# EAGLE board motorboard (EAGLE 8.0.1)
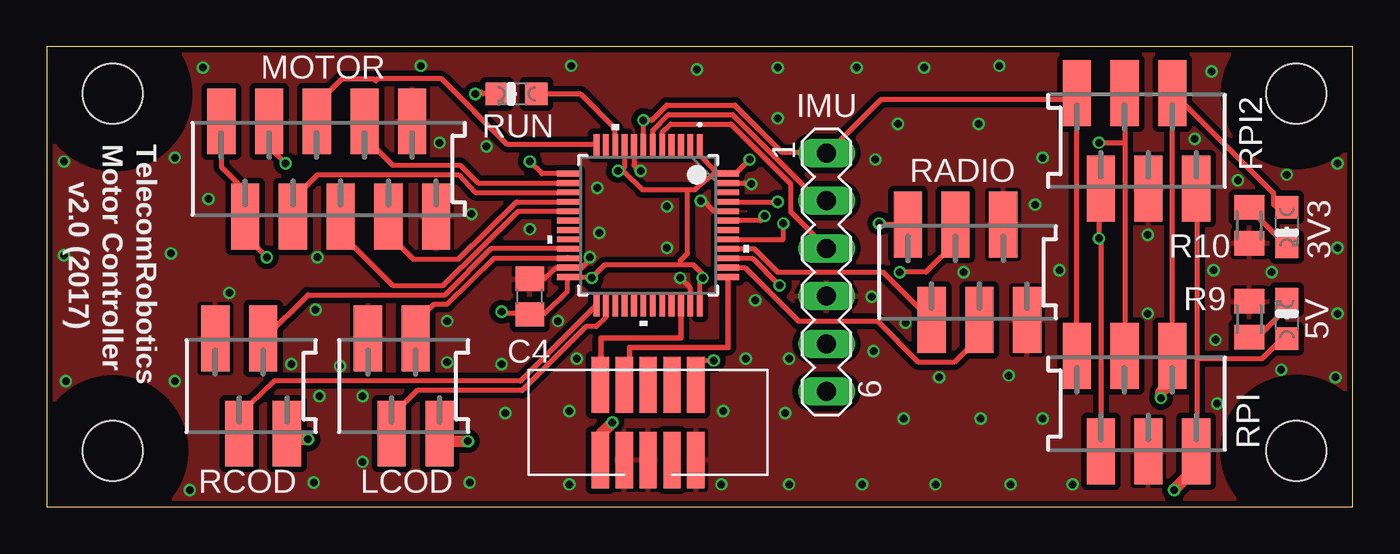
[diagram p0: board, top side]
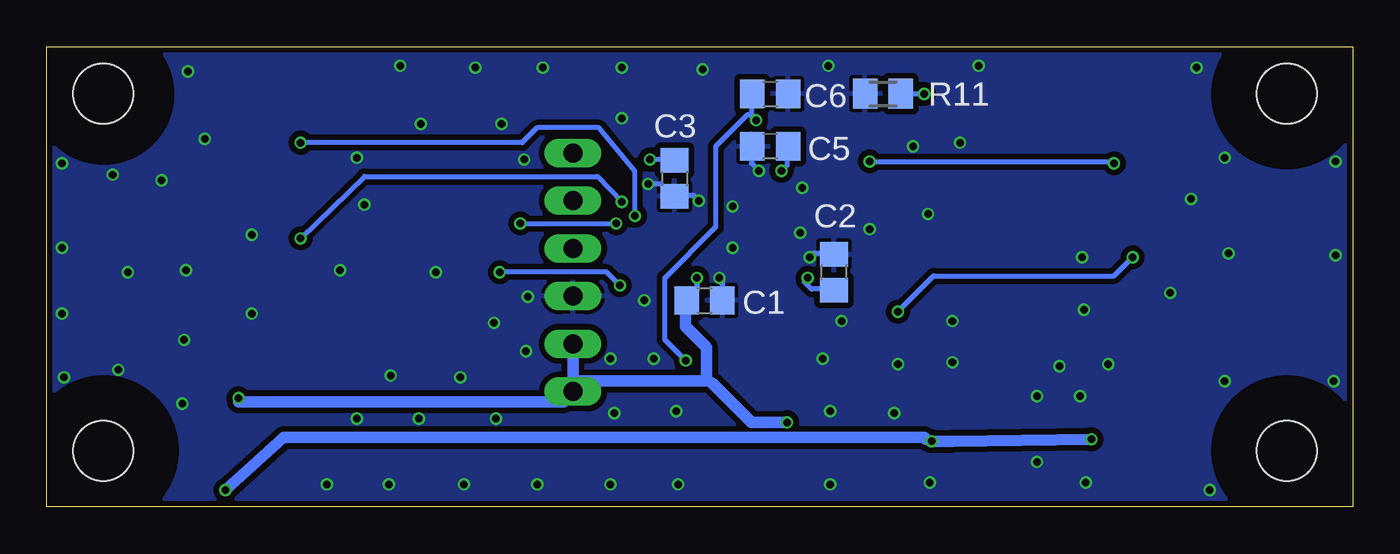
[diagram p1: board, bottom side, seen from below]

Size 69.5 x 24.5 mm. Coordinates in mm from the lower left corner, seen from the top.
Outline: 0,0 69.5,0 69.5,24.5 0,24.5 0,0
Copper layers (1*16): Top 0.018mm / dielectric 1.55mm / Bottom 0.018mm
Design rules "eurocircuit": minimum track width 0.15mm, minimum drill 0.35mm, track to track 0.15mm, track to pad 0.15mm, pad to pad 0.15mm, via to via 0.15mm, smd to smd 0mil, copper to edge 0.25mm, drill to drill 0.35mm, minimum pad ring 0.175mm, minimum via ring 0.125mm, stop-mask expansion 0mil, vias tented up to drill 0.45mm, thermal gap 0.2mm
Holes 3.2 mm at 3.5,3 3.5,22 66.5,3 66.5,22
tRestrict: area 63,18.5 to 70,25.5; area 63,-0.5 to 70,6.5; area 0,-0.5 to 7,6.5; area 63,18.5 to 70,25.5; area 1,0.5 to 6,5.5; area 64,19.5 to 69,24.5; area 64,0.5 to 69,5.5; area 0,18.4 to 7.2,25.6; area 1,19.5 to 6,24.5
bRestrict: area 0,-0.5 to 7,6.5; area 63,-0.5 to 70,6.5; area 1,19.5 to 6,24.5; area 1,0.5 to 6,5.5; area 64,0.5 to 69,5.5; area 64,19.5 to 69,24.5; area 0,18.5 to 7,25.5

## Footprints (pad centres in the part's own frame; a part is rotated, then mirrored left to right if it is on the bottom)
CHIPLED_0805 = smd 1.2 x 1.2: A 0,-1.05; C 0,1.05
C0805 = smd 1.3 x 1.5: 1 -0.95,0; 2 0.95,0
MA06-1 = drill 1.016 long: 1 -6.35,0; 2 -3.81,0; 3 -1.27,0; 4 1.27,0; 5 3.81,0; 6 6.35,0
SMDTOP4 = smd 1.5 x 3.5: 1 -1.905,2.54; 2 -0.635,-2.54; 3 0.635,2.54; 4 1.905,-2.54
SMDTOP10 = smd 1.5 x 3.5: 1 -5.715,2.54; 2 -4.445,-2.54; 3 -3.175,2.54; 4 -1.905,-2.54; 5 -0.635,2.54; 6 0.635,-2.54; 7 1.905,2.54; 8 3.175,-2.54; 9 4.445,2.54; 10 5.715,-2.54
M0805 = smd 1.3 x 1.6: 1 -0.95,0; 2 0.95,0
SMDTOP6 = smd 1.5 x 3.5: 1 -3.175,2.54; 2 -1.905,-2.54; 3 -0.635,2.54; 4 0.635,-2.54; 5 1.905,2.54; 6 3.175,-2.54
LQFP48-7X7MM = smd 1.194 x 0.305: 1 -4.25,2.75; 2 -4.25,2.25; 3 -4.25,1.75; 4 -4.25,1.25; 5 -4.25,0.75; 6 -4.25,0.25; 7 -4.25,-0.25; 8 -4.25,-0.75; 9 -4.25,-1.25; 10 -4.25,-1.75; 11 -4.25,-2.25; 12 -4.25,-2.75; 25 4.25,-2.75; 26 4.25,-2.25; 27 4.25,-1.75; 28 4.25,-1.25; 29 4.25,-0.75; 30 4.25,-0.25; 31 4.25,0.25; 32 4.25,0.75; 33 4.25,1.25; 34 4.25,1.75; 35 4.25,2.25; 36 4.25,2.75 | smd 0.305 x 1.194: 13 -2.75,-4.25; 14 -2.25,-4.25; 15 -1.75,-4.25; 16 -1.25,-4.25; 17 -0.75,-4.25; 18 -0.25,-4.25; 19 0.25,-4.25; 20 0.75,-4.25; 21 1.25,-4.25; 22 1.75,-4.25; 23 2.25,-4.25; 24 2.75,-4.25; 37 2.75,4.25; 38 2.25,4.25; 39 1.75,4.25; 40 1.25,4.25; 41 0.75,4.25; 42 0.25,4.25; 43 -0.25,4.25; 44 -0.75,4.25; 45 -1.25,4.25; 46 -1.75,4.25; 47 -2.25,4.25; 48 -2.75,4.25
SAMTEC_SHF-105-01-L-D-SM = smd 3 x 0.914: P$1 -2,2.54; P$2 2,2.54; P$3 -2,1.27; P$4 2,1.27; P$5 -2,0; P$6 2,0; P$7 -2,-1.27; P$8 2,-1.27; P$9 -2,-2.54; P$10 2,-2.54

## Placement (x,y rotation side)
3V3  [CHIPLED_0805]  66,14.9 180 top
5V  [CHIPLED_0805]  66,10 0 top
C1  100n  [C0805]  34.5,11 0 bottom
C2  100n  [C0805]  27.6,12.5 90 bottom
C3  100n  [C0805]  36.1,17.5 270 bottom
C4  10uF  [C0805]  25.7,11.2 90 top
C5  100nF  [C0805]  31,19.2 180 bottom
C6  100n  [C0805]  31,22 0 bottom
IMU  [MA06-1]  41.5,12.5 270 top
LCOD  [SMDTOP4]  18.99,6.44 0 top
MOTOR  [SMDTOP10]  15,18 0 top
R9  4.7k  [M0805]  64,10 90 top
R10  2.2k  [M0805]  64,15 270 top
R11  1k  [M0805]  25,22 180 bottom
RADIO  [SMDTOP6]  49,12.5 0 top
RCOD  [SMDTOP4]  10.87,6.44 0 top
RPI  [SMDTOP6]  58,5.5 180 top
RPI2  [SMDTOP6]  58,19.5 180 top
RUN  [CHIPLED_0805]  25,22 90 top
U1  STM32F302_303C2  [LQFP48-7X7MM]  32,15 270 top
U$1  SWD/JTAG-_PINS  [SAMTEC_SHF-105-01-L-D-SM]  32,4.5 90 top

## Library data of the parts
3V3 5V RUN = adafruit
C1-C6 R9-R11 = resistor
IMU = con-lstb; OC_FARNELL: unknown; OC_NEWARK: unknown
LCOD MOTOR RADIO RCOD RPI RPI2 = con-amp
U1 = STM32F3xx; COPYRIGHT: Copyright C 2016 Accelerated Designs. All rights reserved; MANUFACTURER_PART_NUMBER: stm32f302_303c2; VENDOR: STMicroelectronics
U$1 = con-SWD

## Nets
GND: C1.2 C2.2 C3.2 C4.2 C5.2 C6.2 IMU.4 LCOD.1 MOTOR.9 MOTOR.10 R9.2 R10.2 R11.2 RADIO.5 RADIO.6 RCOD.1 RPI2.3 RPI.3 U1.8 U1.23 U1.35 U1.44 U1.47 U$1.P$3 U$1.P$5 U$1.P$9
IMU_SCL: IMU.2 U1.6
IMU_SDA: IMU.3 U1.5
LCODA: LCOD.3 U1.22
LCODB: LCOD.2 U1.26
LMOTA: MOTOR.8 U1.16
LMOTB: MOTOR.4 U1.15
LMOTPWM: MOTOR.6 U1.17
N$1: RUN.A U1.10
N$9: R11.1 RUN.C
N$10: 5V.C R9.1
N$14: 3V3.C R10.1
N_RESET: C6.1 IMU.1 RPI2.6 RPI.6 U1.7 U$1.P$10
RAD_MISO: RADIO.2 U1.40
RAD_MOSI: RADIO.1 U1.41
RAD_N_CS: RADIO.4 U1.38
RAD_SCK: RADIO.3 U1.39
RCODA: RCOD.3 U1.21
RCODB: RCOD.2 U1.25
RMOTA: MOTOR.3 U1.13
RMOTB: MOTOR.7 U1.14
RMOTPWM: MOTOR.5 U1.12
RPI_SCL: RPI2.5 RPI.5 U1.45
RPI_SDA: RPI2.4 RPI.4 U1.43
SWD_CLK: U1.37 U$1.P$4
SWD_DIO: U1.34 U$1.P$2
VCC: 3V3.A C1.1 C2.1 C3.1 C4.1 C5.1 IMU.5 IMU.6 MOTOR.1 MOTOR.2 RPI2.2 RPI.2 U1.1 U1.9 U1.24 U1.36 U1.48 U$1.P$1
VDD: 5V.A LCOD.4 RCOD.4 RPI2.1 RPI.1

## Tracks (layer width: path | path; a pad name or v marks a point on that pad's centre or on a via)
GND  (via drill 0.4)
  Top 0.254: 37.2,17.2 v37.5,17.2 37.15,17.25 U1.47 | v28.9,13.3 28.8,13.2 28.8,13.1 28.5,12.75 U1.23 27.1,12.75 26.5,12.2 25.7,12.2 C4.2 | v31.6,17.9 31.25,18.2 U1.8 | v33.7,12.2 34.25,11.65 U1.35 | U1.44 35.5,15.75 34.9,16.4 v34.8,16.3
  Bottom 0.254: v37.5,17.2 36.8,17.2 36,16.6 C3.2 35.9,16.6 35.1,16.6 v34.8,16.3 | v28.9,13.3 28.7,13.5 27.6,13.5 C2.2 | v31.6,17.9 32,18.3 32,19.2 C5.2
  Bottom 0.305: C1.2 33.55,12.05 v33.7,12.2
  other vias: 34.6,23.3 43.1,23.4 50.7,23.5 58.6,14.5 58.6,10.3 68.6,6.9 68.7,10.3 68.7,13.8 68.7,18.3 65.7,7.3 66,17.7 62,23.2 62.3,5.5 62.2,8.9 62.1,12.6 61.1,19.6 63.4,17.4 27.9,23.5 19.9,23.5 8.3,23.4 0.9,18.4 1,6.7 0.9,13.4 6.6,13.5 6.8,6.7 6.8,18.6 9.7,11.4 14.4,13.3 13,7.6 14.3,10.5 15.6,7.5 14.5,5.9 16.8,5.9 14.2,1.3 16.8,2.4 22.5,1.3 7.6,0.9 20.9,19.4 23.4,19.2 29.3,17 29.4,14.6 33,13.8 33,16 39.5,1.2 43.4,1.2 47.3,1.2 51.3,1.2 54.6,1.2 45.6,4.7 49.7,4.7 53,4.7 47.5,6.9 44,8.3 51.2,7 48.8,12.5 53.9,12.6 52.6,16.1 44.1,18.5 53,18.6 46.7,23.4 45.3,20.4 49.6,20.4 22.6,15.6 21.3,9.9 21.3,7.7 24.2,7.6 27.2,9.9 36,5.1 27.8,1.2 27.8,5.1 28.2,7.9 24.4,5 37.7,11 37.2,7.9 39.5,7.9 39.3,5 43.9,11.2 45.7,9.8 38.9,23.4 38.9,20.7 35.9,1.2 65.2,12.5 25.7,14.8 8.6,16.4
  pour Top (isolate 0.305): 0.1,22.4 0.1,3 3.4,0 66.5,0 69.5,3 69.5,21.9 66.9,24.5 2.4,24.5 2.2,24.5
  pour Bottom (isolate 0.305): 0,22.8 0,2.3 1.6,2.3 1.6,0 66.6,0 67.8,0 69.6,1.8 69.6,22.8 68,24.4 1.6,24.4
IMU_SCL
  Top 0.254: IMU.2 41.5,16.4 41,16.4 36.5,20.9 33.1,20.9 32.25,20.05 U1.6
IMU_SDA
  Top 0.254: IMU.3 41.5,13.8 39.6,15.7 39.6,17.2 36.4,20.4 33.2,20.4 32.75,19.95 U1.5
LCODA
  Top 0.254: 19.7,9 LCOD.3 19.6,9.1 19.6,9.8 20.6,10.8 21.3,10.8 23.8,13.25 U1.22 27.7,13.3
LCODB
  Top 0.254: U1.26 29.75,10.1 29.25,9.6 28.7,9.6 25.3,6.2 19.7,6.2 18.4,4.9 18.4,3.9 LCOD.2
LMOTA
  Top 0.254: U1.16 25,16.25 21.9,13.2 19.5,13.2 18.2,14.5 18.2,15.4 MOTOR.8
LMOTB
  Top 0.254: U1.15 22.8,16.75 21.9,17.7 14.4,17.7 13.1,16.4 13.1,15.5 MOTOR.4
LMOTPWM
  Top 0.254: U1.17 25.1,15.75 21.1,11.8 18.4,11.8 15.6,14.6 15.6,15.4 MOTOR.6
N$1
  Top 0.254: RUN.A 28.4,22 30.25,20.15 U1.10
N$9  (via drill 0.4)
  Top 0.254: RUN.C 23.2,22 23.1,22.1 23,22 v22.8,22
  Bottom 0.254: R11.1 v22.8,22
N$10
  Top 0.254: 5V.C 66,11.1 65.6,11.1 65.5,11 65.5,10.1 64.5,9.1 64,9.1 R9.1
N$14
  Top 0.254: 3V3.C 66,13.9 64,15.9 R10.1
N_RESET  (via drill 0.4)
  Top 0.254: U1.7 v31.75,20.6 32.2,20.6 33,21.4 36.6,21.4 39.1,18.9 41.5,18.9 IMU.1 41.6,18.9 44.4,21.7 54.7,21.7 54.8,21.8 54.8,22 RPI2.6 54.8,21.7 54.8,8.1 RPI.6 | v35.5,7.8 35,7.8 34.5,7.3 34.5,6.5 U$1.P$10
  Bottom 0.254: v31.75,20.6 32,20.8 32,20.9 | 32,20.9 32,22 C6.1 | v35.5,7.8 36.6,8.9 36.6,12.2 33.9,14.9 33.9,19.2 32.2,20.9 32,20.9
RAD_MISO
  Top 0.254: RADIO.2 47,10 44.5,12.5 38.9,12.5 37.65,13.75 U1.40
RAD_MOSI  (via drill 0.4)
  Top 0.254: v44.3,15.1 45.8,15 45.9,15.1 RADIO.1 | v39.2,15.1 39.2,14.25 U1.41
  Bottom 0.254: v44.3,15.1 v39.2,15.1
RAD_N_CS
  Top 0.254: RADIO.4 49.6,9.9 49.6,9 48.3,7.7 46.4,7.7 44.2,9.9 40,9.9 37.15,12.75 U1.38
RAD_SCK  (via drill 0.4)
  Top 0.254: v45.4,12.5 46.8,12.5 48.4,14.1 48.4,15 RADIO.3 | v39,11.8 37.55,13.25 U1.39
  Bottom 0.254: v45.4,12.5 39.7,12.5 v39,11.8
RCODA
  Top 0.254: U1.21 23.65,13.75 21.2,11.3 13.9,11.3 11.6,9 RCOD.3
RCODB
  Top 0.254: RCOD.2 10.2,3.9 10.2,4.9 12.1,6.7 25.2,6.7 U1.25
RMOTA  (via drill 0.4)
  Top 0.254: v25.7,18.4 26.35,17.75 U1.13 | v12.7,18.3 11.8,19.2 11.8,20.5 MOTOR.3
  Bottom 0.254: v25.7,18.4 12.8,18.4 v12.7,18.3
RMOTB
  Top 0.254: U1.14 22.95,17.25 22,18.2 18.4,18.2 16.9,19.7 16.9,20.5 MOTOR.7
RMOTPWM
  Top 0.254: U1.12 29.2,19.3 24.5,19.3 21,22.8 17.6,22.8 17.5,22.7 17.4,22.8 15.7,22.8 14.4,21.5 14.4,20.6 MOTOR.5
RPI_SCL  (via drill 0.4)
  Top 0.254: U1.45 v38.9,16.25 | RPI2.5 56.1,16.9 56.1,15.6 56,15.4 v56,14.3 56.1,14.4 56.1,3 RPI.5
  Bottom 0.254: v38.9,16.25 40.2,17.6 52.6,17.6 v56,14.3
RPI_SDA  (via drill 0.4)
  Top 0.254: 57.4,19.4 57.4,8.1 RPI.4 | 57.4,19.4 57.4,22 RPI2.4 | v56,19.4 57.4,19.4 | U1.43 36.35,15.25 38,15.25 v38.2,15.5
  Bottom 0.254: v56,19.4 44.2,19.4 43.4,20.2 40.1,20.2 38.2,17.9 v38.2,15.5
SWD_CLK
  Top 0.305: U$1.P$4 31,6.5 31,8.5 36.25,8.5 U1.37
SWD_DIO
  Top 0.305: U$1.P$2 29.5,6.5 29.5,9 33.75,9 U1.34
VCC  (via drill 0.4)
  Top 0.254: U1.36 34.75,12.05 v34.9,12.2 34.9,12.4 34.4,12.9 33.7,12.9 | v37.4,18.5 36.7,17.8 36.3,17.8 U1.48 36.2,17.8 35.6,17.8 | 3V3.A 66,16 65.4,16 65.3,16.1 65.3,16.7 60,22 RPI2.2 59.9,22 59.9,8.1 RPI.2 | 33.7,12.9 29.7,12.9 v29,12.2 28.9,12.25 U1.24 27.7,12.2 27.7,11.5 26.5,10.3 25.7,10.3 C4.1 25.6,10.3 24.3,10.3 v24.2,10.4 | 35.6,17.8 34.5,16.9 34.1,16.9 | U1.9 30.75,18.1 30.6,17.9 v30.4,17.9 30.7,17.9 31.7,16.9 34.1,16.9 | U1.1 34.75,18.75 35.6,17.9 35.6,17.8 | MOTOR.1 9.3,20.5 9.3,18.1 10.6,16.8 10.6,15.5 MOTOR.2 10.6,15.4 10.6,14.4 v11.7,13.3 | 34.1,16.9 34.1,13.5 33.7,13.1 33.7,12.9
  Top 0.61: v59.3,5.8 59.3,6.1 59.9,6.7 59.9,8 RPI.2 | v30.1,4.5 29.5,3.9 29.5,2.5 U$1.P$1
  Bottom 0.254: v37.4,18.5 36,18.5 C3.1 | C2.1 27.6,11.6 28.8,11.6 29.2,12 v29,12.2 | v30.4,17.9 30.1,18.2 30.1,19.2 C5.1 | v11.7,13.3 12.7,12.3 22.3,12.3 v24.2,10.4
  Bottom 0.305: v34.9,12.2 34.9,11.55 C1.1
  Bottom 0.61: v59.3,5.8 59.3,5.6 42,5.6 41.5,6.1 IMU.6 | IMU.6 IMU.5 | 34.4,6.7 41.2,6.7 IMU.6 | 34.4,6.7 34.4,8.5 35.5,9.6 35.5,10.9 C1.1 | v30.1,4.5 32,4.5 34.1,6.6 34.4,6.7
VDD  (via drill 0.4)
  Top 0.254: 61.2,7.9 61.2,16.9 RPI2.1 | 61.2,7.9 61.2,3 RPI.1 | 61.2,7.9 64.7,7.9 65.8,9 66,9 5V.A
  Top 0.61: v60,0.9 61.2,2.1 61.2,2.9 RPI.1 | v22.4,3.5 21.2,3.5 20.9,4 20.8,3.9 LCOD.4 | v13.9,3.6 12.9,3.6 12.8,4 12.7,3.9 RCOD.4
  Bottom 0.61: v60,0.9 56.9,3.7 22.8,3.7 22.7,3.6 v22.4,3.5 21.3,3.5 v13.9,3.6

## Text on the board
tNames: Motor Controller | TelecomRobotics | v2.0 (2017)